# Altium PCB PCB2.PcbDoc (part 3 of 3)
Units mm, origin at the board's own origin, x right, y up, seen from the top; angles counter-clockwise.
Board outline 89.15 x 51.05 mm, 2 copper layers (Top Layer, Bottom Layer); 28 components, 20 nets, 117 pads, 27 vias.
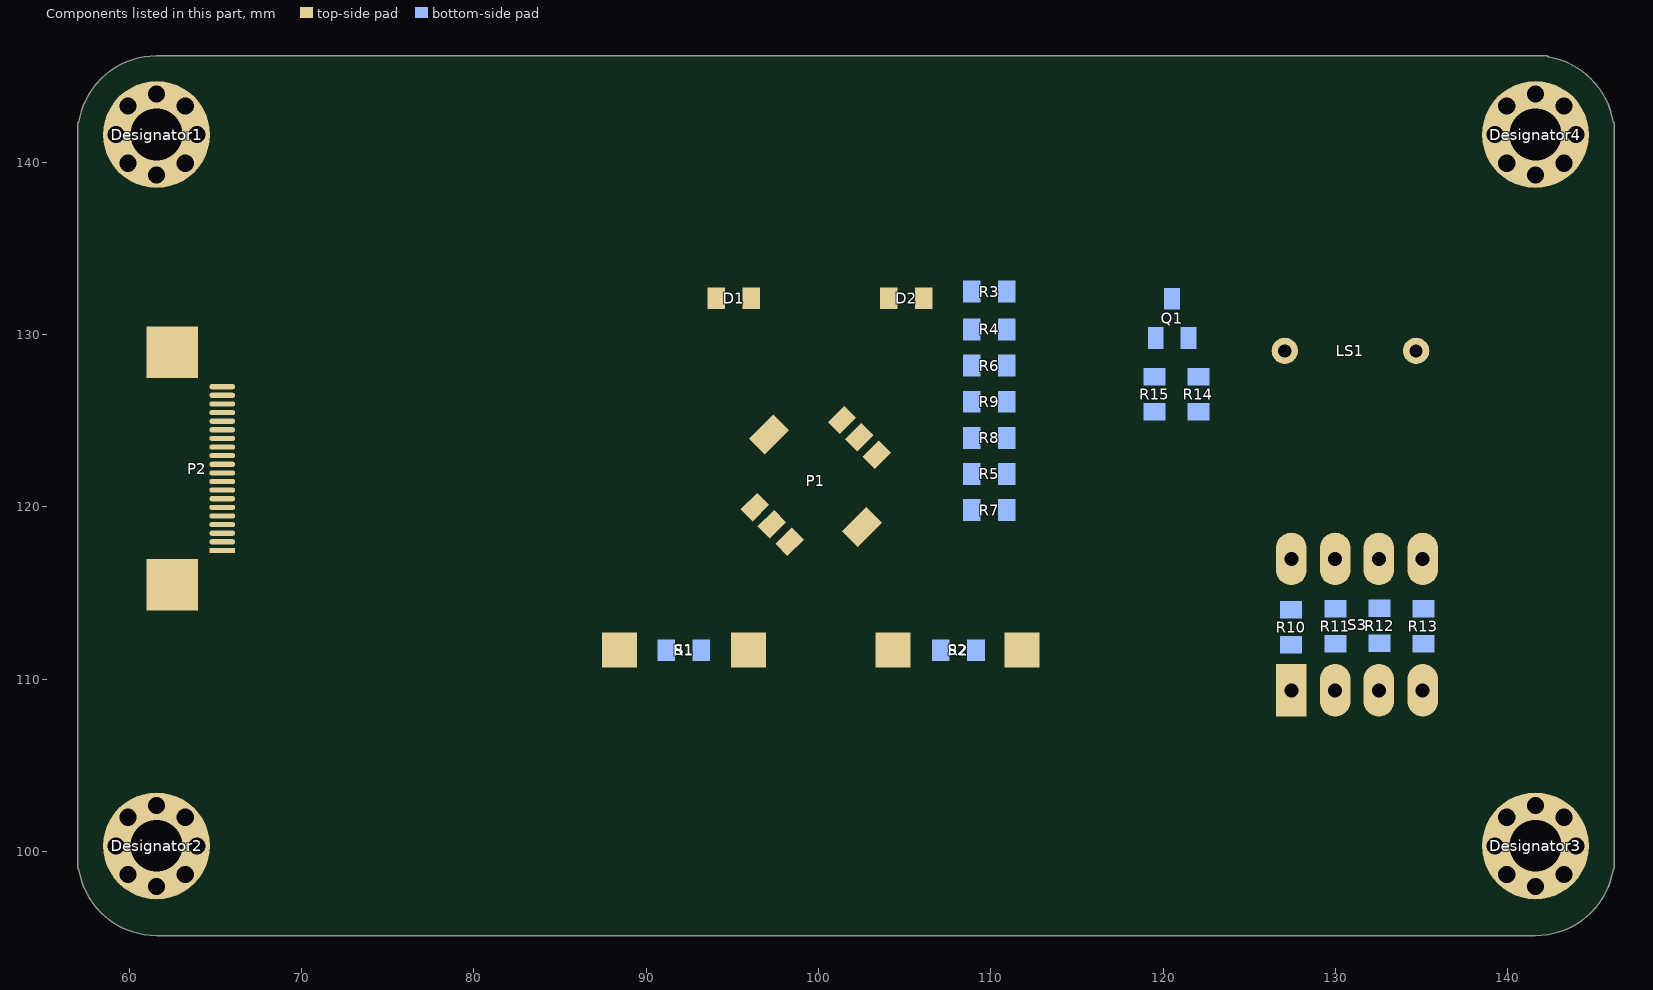
[diagram p3: the components of this part, seen from the top]

## Via types
v1: diameter 0.6, hole 0.3, Top Layer to Bottom Layer, 21 vias
v2: diameter 0.8, hole 0.4, Top Layer to Bottom Layer, 4 vias
v3: diameter 0.7, hole 0.7, Top Layer to Bottom Layer, 1 vias
v4: diameter 1, hole 1, Top Layer to Bottom Layer, 1 vias

## Nets (pads, with @x,y where several pads share a name; then routed paths per layer and width w, separated by ;. In a path a pad name is that pad's centre, name@x,y a point inside that pad or via, vN(x,y) a via of type N, cw(c..) or ccw(c..) an arc to the next point about the centre after c; other vN are vias at no path point) (continued)
copper on no net: (continued)
  Top Layer w0.009: 106.861,98.687 106.864,98.687 ; 106.861,98.704 106.864,98.704 ; 106.861,98.713 106.864,98.713 ; 106.861,98.74 106.864,98.74 ; 106.861,98.758 106.864,98.758 ; 106.861,98.767 106.864,98.767 ; 106.861,98.776 106.864,98.776 ; 106.861,98.811 106.864,98.811 ; 106.861,98.82 106.864,98.82 ; 106.861,98.829 106.864,98.829 ; 106.861,98.838 106.864,98.838 ; 106.861,98.9 106.864,98.9 ; 106.861,98.953 106.864,98.953 ; 106.861,99.033 106.864,99.033 ; 106.861,99.051 106.864,99.051 ; 106.861,99.06 106.864,99.06 ; 106.861,99.078 106.864,99.078 ; 106.861,99.087 106.864,99.087 ; 106.861,99.416 106.864,99.416 ; 106.861,101.505 106.864,101.505 ; 106.87,102.589 108.562,102.589 ; 106.87,102.598 106.873,102.598 ; 106.879,98.26 106.899,98.26 ; 106.879,98.278 106.882,98.278 ; 106.879,99.416 106.899,99.416 ; 106.887,101.496 107.548,101.496 ; 106.887,101.505 107.53,101.505 ; 106.887,101.531 106.89,101.531 ; 106.887,102.598 108.562,102.598 ; 106.896,101.514 106.899,101.514 ; 106.905,101.531 107.548,101.531 ; 106.914,99.416 106.917,99.416 ; 106.914,99.424 106.917,99.424 ; 106.914,101.514 107.548,101.514 ; 106.914,101.523 107.548,101.523 ; 106.923,101.549 107.53,101.549 ; 106.923,102.58 106.926,102.58 ; 106.932,98.242 106.935,98.242 ; 106.932,101.54 106.935,101.54 ; 106.932,102.572 106.953,102.572 ; 106.941,98.224 106.944,98.224 ; 106.941,98.233 108.562,98.233 ; 106.95,101.54 107.539,101.54 ; 106.95,102.58 108.562,102.58 ; 106.959,98.224 108.562,98.224 ; 106.967,98.215 106.988,98.215 ; 106.967,98.251 106.97,98.251 ; 106.967,99.416 106.97,99.416 ; 106.967,99.442 106.979,99.442 ; 106.967,102.572 108.562,102.572 ; 106.976,101.567 107.53,101.567 ; 106.985,98.251 106.988,98.251 ; 106.985,101.558 107.53,101.558 ; 106.985,101.585 106.988,101.585 ; 106.985,102.554 106.988,102.554 ; 106.994,99.433 106.997,99.433 ; 106.994,99.451 107.006,99.451 ; 106.994,101.594 107.53,101.594 ; 106.994,102.545 106.997,102.545 ; 106.994,102.563 108.562,102.563 ; 107.012,98.215 108.562,98.215 ; 107.012,98.242 107.015,98.242 ; 107.012,98.251 107.059,98.251 ; 107.012,99.433 107.024,99.433 ; 107.012,101.576 107.53,101.576 ; 107.012,101.585 107.015,101.585 ; 107.012,102.545 108.562,102.545 ; 107.021,99.451 107.024,99.451 ; 107.03,101.585 107.53,101.585 ; 107.03,102.554 108.562,102.554 ; 107.039,98.242 107.042,98.242 ; 107.039,101.603 107.53,101.603 ; 107.039,101.611 107.53,101.611 ; 107.039,102.527 107.05,102.527 ; 107.047,101.629 107.05,101.629 ; 107.056,98.242 107.068,98.242 ; 107.056,99.46 107.059,99.46 ; 107.056,102.536 107.059,102.536 ; 107.074,98.251 108.562,98.251 ; 107.074,98.26 107.077,98.26 ; 107.074,99.46 107.077,99.46 ; 107.074,101.629 107.077,101.629 ; 107.074,102.527 108.562,102.527 ; 107.083,98.242 108.562,98.242 ; 107.092,101.629 107.513,101.629 ; 107.092,102.509 107.095,102.509 ; 107.092,102.536 108.562,102.536 ; 107.101,98.269 108.562,98.269 ; 107.101,101.62 107.522,101.62 ; 107.101,102.518 107.113,102.518 ; 107.11,98.26 108.562,98.26 ; 107.11,98.295 107.113,98.295 ; 107.119,98.287 107.13,98.287 ; 107.119,99.469 107.122,99.469 ; 107.119,101.638 107.513,101.638 ; 107.119,101.647 107.513,101.647 ; 107.119,102.509 108.562,102.509 ; 107.127,98.295 107.139,98.295 ; 107.127,102.492 107.13,102.492 ; 107.127,102.518 107.139,102.518 ; 107.154,98.287 108.562,98.287 ; 107.154,98.295 108.562,98.295 ; 107.154,98.304 107.157,98.304 ; 107.154,101.656 107.157,101.656 ; 107.154,101.665 107.157,101.665 ; 107.154,102.518 108.562,102.518 ; 107.163,98.278 108.562,98.278 ; 107.163,101.674 107.486,101.674 ; 107.172,98.313 108.562,98.313 ; 107.172,99.496 107.175,99.496 ; 107.172,101.656 107.495,101.656 ; 107.172,101.665 107.175,101.665 ; 107.172,102.5 107.175,102.5 ; 107.19,101.665 107.495,101.665 ; 107.19,102.492 108.562,102.492 ; 107.19,102.5 108.562,102.5 ; 107.199,101.691 107.202,101.691 ; 107.199,102.465 107.202,102.465 ; 107.207,98.304 108.562,98.304 ; 107.216,101.691 107.486,101.691 ; 107.216,102.465 108.562,102.465 ; 107.216,102.474 107.219,102.474 ; 107.216,102.483 108.562,102.483 ; 107.225,99.513 107.228,99.513 ; 107.225,99.522 107.228,99.522 ; 107.225,101.683 107.486,101.683 ; 107.234,98.322 108.562,98.322 ; 107.234,102.447 107.237,102.447 ; 107.234,102.474 108.562,102.474 ; 107.243,102.456 107.246,102.456 ; 107.252,98.331 108.562,98.331 ; 107.252,101.7 107.264,101.7 ; 107.252,101.709 107.264,101.709 ; 107.261,99.531 107.264,99.531 ; 107.27,99.54 107.273,99.54 ; 107.27,102.447 108.562,102.447 ; 107.27,102.456 108.562,102.456 ; 107.279,98.34 108.562,98.34 ; 107.279,98.349 108.562,98.349 ; 107.279,99.531 107.282,99.531 ; 107.279,101.709 107.486,101.709 ; 107.287,98.358 108.562,98.358 ; 107.287,98.375 107.29,98.375 ; 107.287,101.7 107.486,101.7 ; 107.287,102.429 107.299,102.429 ; 107.287,102.438 108.562,102.438 ; 107.314,98.367 107.317,98.367 ; 107.314,98.375 108.562,98.375 ; 107.314,102.429 108.562,102.429 ; 107.332,98.367 108.562,98.367 ; 107.332,101.718 107.335,101.718 ; 107.332,101.736 107.486,101.736 ; 107.332,102.403 107.335,102.403 ; 107.332,102.42 107.335,102.42 ; 107.341,99.576 107.344,99.576 ; 107.341,102.412 108.562,102.412 ; 107.35,98.384 107.353,98.384 ; 107.35,99.602 107.353,99.602 ; 107.35,101.718 107.353,101.718 ; 107.35,102.403 108.562,102.403 ; 107.35,102.42 108.562,102.42 ; 107.367,101.727 107.379,101.727 ; 107.376,98.384 108.562,98.384 ; 107.376,98.393 107.379,98.393 ; 107.376,98.411 107.379,98.411 ; 107.376,102.394 107.379,102.394 ; 107.394,98.393 108.562,98.393 ; 107.394,98.411 107.397,98.411 ; 107.394,101.718 107.397,101.718 ; 107.394,101.727 107.468,101.727 ; 107.394,102.376 107.397,102.376 ; 107.394,102.394 108.562,102.394 ; 107.403,98.402 108.562,98.402 ; 107.412,98.411 108.562,98.411 ; 107.412,98.42 107.415,98.42 ; 107.412,101.718 107.459,101.718 ; 107.412,102.367 107.415,102.367 ; 107.412,102.385 107.424,102.385 ; 107.421,98.438 108.562,98.438 ; 107.421,99.665 107.433,99.665 ; 107.421,102.376 108.562,102.376 ; 107.439,98.429 108.562,98.429 ; 107.439,102.349 107.442,102.349 ; 107.439,102.367 108.562,102.367 ; 107.439,102.385 108.562,102.385 ; 107.448,98.42 108.562,98.42 ; 107.456,98.447 107.459,98.447 ; 107.456,98.455 107.459,98.455 ; 107.456,102.349 107.459,102.349 ; 107.456,102.358 108.562,102.358 ; 107.465,99.709 107.468,99.709 ; 107.474,98.447 108.562,98.447 ; 107.474,98.455 108.562,98.455 ; 107.474,101.718 107.477,101.718 ; 107.474,102.34 107.477,102.34 ; 107.474,102.349 108.562,102.349 ; 107.483,101.727 107.486,101.727 ; 107.483,102.332 108.562,102.332 ; 107.492,98.464 108.562,98.464 ; 107.492,98.473 108.562,98.473 ; 107.492,102.34 108.562,102.34 ; 107.501,99.736 107.513,99.736 ; 107.501,101.674 107.513,101.674 ; 107.501,101.683 107.504,101.683 ; 107.501,101.691 107.513,101.691 ; 107.501,102.314 107.504,102.314 ; 107.51,99.718 107.513,99.718 ; 107.51,99.727 107.513,99.727 ; 107.51,101.656 107.522,101.656 ; 107.51,101.665 107.513,101.665 ; 107.51,101.709 107.513,101.709 ; 107.519,102.305 108.562,102.305 ; 107.519,102.314 108.562,102.314 ; 107.519,102.323 108.562,102.323 ; 107.528,101.158 107.53,101.158 ; 107.528,101.176 107.53,101.176 ; 107.528,101.629 107.53,101.629 ; 107.536,98.482 108.562,98.482 ; 107.536,98.491 108.562,98.491 ; 107.536,98.5 108.562,98.5 ; 107.536,102.287 107.539,102.287 ; 107.545,101.46 107.548,101.46 ; 107.545,101.549 107.548,101.549 ; 107.545,102.296 108.562,102.296 ; 107.554,98.509 107.557,98.509 ; 107.554,102.287 108.562,102.287 ; 107.572,99.798 107.575,99.798 ; 107.572,99.816 107.575,99.816 ; 107.572,101.051 107.575,101.051 ; 107.581,98.509 108.562,98.509 ; 107.581,102.269 108.562,102.269 ; 107.581,102.278 108.562,102.278 ; 107.59,99.833 107.593,99.833 ; 107.59,101.016 107.593,101.016 ; 107.599,98.518 108.562,98.518 ; 107.599,98.527 108.562,98.527 ; 107.599,98.535 107.602,98.535 ; 107.599,99.869 107.602,99.869 ; 107.608,98.544 107.61,98.544 ; 107.608,99.86 107.61,99.86 ; 107.608,100.998 107.61,100.998 ; 107.608,101.025 107.61,101.025 ; 107.608,102.243 108.562,102.243 ; 107.616,98.535 108.562,98.535 ; 107.616,102.225 107.619,102.225 ; 107.616,102.252 108.562,102.252 ; 107.616,102.26 108.562,102.26 ; 107.625,98.553 108.562,98.553 ; 107.625,99.896 107.628,99.896 ; 107.625,99.922 107.628,99.922 ; 107.634,98.544 108.562,98.544 ; 107.634,100.962 107.637,100.962 ; 107.634,102.225 108.562,102.225 ; 107.634,102.234 107.637,102.234 ; 107.643,98.562 108.562,98.562 ; 107.643,98.571 108.562,98.571 ; 107.643,99.967 107.646,99.967 ; 107.643,99.976 107.646,99.976 ; 107.652,102.207 107.655,102.207 ; 107.652,102.216 107.655,102.216 ; 107.652,102.234 108.562,102.234 ; 107.661,98.589 107.664,98.589 ; 107.661,98.598 107.664,98.598 ; 107.661,100.011 107.664,100.011 ; 107.661,100.874 107.673,100.874 ; 107.661,100.909 107.664,100.909 ; 107.67,100.002 107.673,100.002 ; 107.67,100.882 107.673,100.882 ; 107.67,100.891 107.673,100.891 ; 107.67,100.9 107.673,100.9 ; 107.67,102.207 108.562,102.207 ; 107.679,98.589 108.562,98.589 ; 107.679,98.598 108.562,98.598 ; 107.679,102.189 107.682,102.189 ; 107.679,102.198 107.682,102.198 ; 107.679,102.216 108.562,102.216 ; 107.688,98.58 108.562,98.58 ; 107.688,102.18 108.562,102.18 ; 107.696,98.615 108.562,98.615 ; 107.696,102.163 107.699,102.163 ; 107.696,102.189 108.562,102.189 ; 107.696,102.198 108.562,102.198 ; 107.705,100.136 107.708,100.136 ; 107.705,100.145 107.708,100.145 ; 107.705,100.189 107.708,100.189 ; 107.705,100.722 107.708,100.722 ; 107.714,98.607 108.562,98.607 ; 107.714,102.163 108.562,102.163 ; 107.714,102.171 108.562,102.171 ; 107.723,98.624 108.562,98.624 ; 107.723,98.633 107.726,98.633 ; 107.723,100.207 107.726,100.207 ; 107.723,100.242 107.735,100.242 ; 107.723,100.313 107.735,100.313 ; 107.723,100.367 107.735,100.367 ; 107.723,100.554 107.753,100.554 ; 107.723,100.651 107.735,100.651 ; 107.723,100.678 107.735,100.678 ; 107.723,100.687 107.726,100.687 ; 107.723,100.696 107.735,100.696 ; 107.723,100.714 107.735,100.714 ; 107.723,100.722 107.735,100.722 ; 107.732,100.233 107.735,100.233 ; 107.732,100.251 107.735,100.251 ; 107.732,100.26 107.735,100.26 ; 107.732,100.296 107.735,100.296 ; 107.732,100.305 107.735,100.305 ; 107.732,100.34 107.735,100.34 ; 107.732,100.358 107.744,100.358 ; 107.732,100.402 107.735,100.402 ; 107.732,100.429 107.753,100.429 ; 107.732,100.474 107.735,100.474 ; 107.732,100.625 107.735,100.625 ; 107.732,100.642 107.744,100.642 ; 107.732,100.669 107.735,100.669 ; 107.732,100.705 107.735,100.705 ; 107.732,100.74 107.735,100.74 ; 107.741,98.633 108.562,98.633 ; 107.741,98.642 107.744,98.642 ; 107.741,98.66 107.744,98.66 ; 107.741,102.145 108.562,102.145 ; 107.75,100.367 107.753,100.367 ; 107.75,100.385 107.753,100.385 ; 107.75,100.393 107.753,100.393 ; 107.75,100.402 107.753,100.402 ; 107.75,100.411 107.753,100.411 ; 107.75,100.438 107.753,100.438 ; 107.75,100.491 107.753,100.491 ; 107.75,100.5 107.753,100.5 ; 107.75,100.536 107.753,100.536 ; 107.75,100.545 107.753,100.545 ; 107.75,100.58 107.753,100.58 ; 107.75,102.154 108.562,102.154 ; 107.759,98.642 107.762,98.642 ; 107.759,98.651 108.562,98.651 ; 107.759,98.66 108.562,98.66 ; 107.768,98.678 108.562,98.678 ; 107.768,102.127 108.562,102.127 ; 107.768,102.136 108.562,102.136 ; 107.776,98.642 108.562,98.642 ; 107.776,98.669 108.562,98.669 ; 107.776,102.1 108.562,102.1 ; 107.776,102.118 107.788,102.118 ; 107.785,102.109 107.788,102.109 ; 107.803,98.696 108.562,98.696 ; 107.803,102.083 107.806,102.083 ; 107.803,102.109 108.562,102.109 ; 107.803,102.118 108.562,102.118 ; 107.812,98.687 108.562,98.687 ; 107.812,102.091 108.562,102.091 ; 107.821,98.704 107.824,98.704 ; 107.821,98.722 108.562,98.722 ; 107.821,102.074 107.824,102.074 ; 107.821,102.083 108.562,102.083 ; 107.83,98.713 108.562,98.713 ; 107.83,102.065 108.562,102.065 ; 107.839,98.704 108.562,98.704 ; 107.839,98.731 107.851,98.731 ; 107.839,98.74 108.562,98.74 ; 107.839,102.074 108.562,102.074 ; 107.848,102.056 107.851,102.056 ; 107.856,102.047 108.562,102.047 ; 107.865,98.731 108.562,98.731 ; 107.865,98.758 108.562,98.758 ; 107.865,102.056 108.562,102.056 ; 107.874,98.749 108.562,98.749 ; 107.874,102.029 108.562,102.029 ; 107.883,98.767 107.886,98.767 ; 107.883,98.776 107.886,98.776 ; 107.883,102.011 107.886,102.011 ; 107.883,102.038 108.562,102.038 ; 107.901,98.767 108.562,98.767 ; 107.901,98.776 108.562,98.776 ; 107.901,98.802 108.562,98.802 ; 107.901,101.994 107.904,101.994 ; 107.901,102.003 108.562,102.003 ; 107.901,102.011 108.562,102.011 ; 107.901,102.02 108.562,102.02 ; 107.919,98.784 108.562,98.784 ; 107.919,98.793 108.562,98.793 ; 107.919,98.811 107.922,98.811 ; 107.919,98.82 107.922,98.82 ; 107.919,101.985 108.562,101.985 ; 107.919,101.994 108.562,101.994 ; 107.928,101.967 108.562,101.967 ; 107.936,98.811 108.562,98.811 ; 107.936,98.82 108.562,98.82 ; 107.936,98.829 107.939,98.829 ; 107.936,98.838 107.939,98.838 ; 107.936,101.94 107.939,101.94 ; 107.936,101.949 107.939,101.949 ; 107.936,101.976 108.562,101.976 ; 107.954,98.829 108.562,98.829 ; 107.954,98.838 108.562,98.838 ; 107.954,101.949 108.562,101.949 ; 107.963,101.931 107.966,101.931 ; 107.963,101.94 108.562,101.94 ; 107.963,101.958 108.562,101.958 ; 107.972,98.847 108.562,98.847 ; 107.981,98.856 108.562,98.856 ; 107.981,98.864 108.562,98.864 ; 107.981,98.873 108.562,98.873 ; 107.981,98.9 107.984,98.9 ; 107.981,101.905 108.562,101.905 ; 107.981,101.923 108.562,101.923 ; 107.981,101.931 108.562,101.931 ; 107.99,98.891 108.562,98.891 ; 107.999,98.882 108.562,98.882 ; 107.999,98.9 108.562,98.9 ; 107.999,98.909 108.002,98.909 ; 107.999,101.878 108.562,101.878 ; 107.999,101.887 108.002,101.887 ; 107.999,101.896 108.002,101.896 ; 107.999,101.914 108.562,101.914 ; 108.016,98.909 108.028,98.909 ; 108.016,98.918 108.562,98.918 ; 108.016,98.936 108.019,98.936 ; 108.016,101.86 108.019,101.86 ; 108.016,101.887 108.562,101.887 ; 108.016,101.896 108.562,101.896 ; 108.025,98.927 108.028,98.927 ; 108.025,101.843 108.028,101.843 ; 108.025,101.869 108.562,101.869 ; 108.043,98.909 108.562,98.909 ; 108.043,98.927 108.562,98.927 ; 108.043,98.936 108.562,98.936 ; 108.043,98.98 108.046,98.98 ; 108.043,101.843 108.046,101.843 ; 108.043,101.86 108.562,101.86 ; 108.052,98.944 108.562,98.944 ; 108.052,98.953 108.562,98.953 ; 108.052,98.962 108.562,98.962 ; 108.052,101.825 108.064,101.825 ; 108.052,101.834 108.562,101.834 ; 108.052,101.851 108.562,101.851 ; 108.061,98.971 108.064,98.971 ; 108.061,101.798 108.064,101.798 ; 108.061,101.807 108.064,101.807 ; 108.061,101.816 108.562,101.816 ; 108.061,101.843 108.562,101.843 ; 108.07,98.98 108.562,98.98 ; 108.079,98.971 108.562,98.971 ; 108.079,98.989 108.082,98.989 ; 108.079,98.998 108.082,98.998 ; 108.079,101.789 108.091,101.789 ; 108.079,101.798 108.562,101.798 ; 108.079,101.807 108.562,101.807 ; 108.079,101.825 108.562,101.825 ; 108.096,98.989 108.562,98.989 ; 108.096,98.998 108.562,98.998 ; 108.105,99.016 108.562,99.016 ; 108.105,99.024 108.562,99.024 ; 108.105,99.033 108.108,99.033 ; 108.105,101.763 108.562,101.763 ; 108.105,101.771 108.108,101.771 ; 108.105,101.78 108.562,101.78 ; 108.105,101.789 108.562,101.789 ; 108.114,99.007 108.562,99.007 ; 108.123,99.033 108.562,99.033 ; 108.123,99.042 108.562,99.042 ; 108.123,99.051 108.126,99.051 ; 108.123,99.06 108.126,99.06 ; 108.123,101.745 108.562,101.745 ; 108.123,101.754 108.562,101.754 ; 108.123,101.771 108.562,101.771 ; 108.132,101.727 108.562,101.727 ; 108.141,99.051 108.562,99.051 ; 108.141,99.06 108.562,99.06 ; 108.141,99.069 108.562,99.069 ; 108.141,99.087 108.562,99.087 ; 108.141,99.096 108.144,99.096 ; 108.141,101.718 108.562,101.718 ; 108.141,101.736 108.562,101.736 ; 108.15,99.078 108.562,99.078 ; 108.159,99.096 108.562,99.096 ; 108.159,101.7 108.562,101.7 ; 108.159,101.709 108.562,101.709 ; 108.168,99.104 108.562,99.104 ; 108.168,101.683 108.562,101.683 ; 108.168,101.691 108.562,101.691 ; 108.176,99.122 108.562,99.122 ; 108.185,99.113 108.562,99.113 ; 108.185,99.131 108.188,99.131 ; 108.185,99.14 108.562,99.14 ; 108.185,101.638 108.188,101.638 ; 108.185,101.656 108.562,101.656 ; 108.185,101.665 108.562,101.665 ; 108.185,101.674 108.562,101.674 ; 108.194,101.629 108.197,101.629 ; 108.203,99.131 108.562,99.131 ; 108.203,99.149 108.562,99.149 ; 108.203,99.158 108.562,99.158 ; 108.203,99.167 108.206,99.167 ; 108.203,99.176 108.215,99.176 ; 108.203,99.184 108.206,99.184 ; 108.203,101.611 108.206,101.611 ; 108.203,101.62 108.562,101.62 ; 108.203,101.638 108.562,101.638 ; 108.203,101.647 108.562,101.647 ; 108.221,99.167 108.562,99.167 ; 108.221,99.184 108.562,99.184 ; 108.221,101.603 108.562,101.603 ; 108.221,101.629 108.562,101.629 ; 108.23,99.193 108.562,99.193 ; 108.23,99.202 108.562,99.202 ; 108.23,99.22 108.562,99.22 ; 108.23,101.611 108.562,101.611 ; 108.239,99.176 108.562,99.176 ; 108.239,99.211 108.562,99.211 ; 108.239,99.229 108.242,99.229 ; 108.239,99.238 108.242,99.238 ; 108.239,99.247 108.251,99.247 ; 108.239,101.558 108.562,101.558 ; 108.239,101.567 108.562,101.567 ; 108.239,101.576 108.562,101.576 ; 108.239,101.585 108.562,101.585 ; 108.239,101.594 108.562,101.594 ; 108.248,101.54 108.562,101.54 ; 108.248,101.549 108.251,101.549 ; 108.256,99.238 108.562,99.238 ; 108.256,99.256 108.562,99.256 ; 108.265,99.229 108.562,99.229 ; 108.265,99.247 108.562,99.247 ; 108.265,99.264 108.562,99.264 ; 108.265,99.273 108.268,99.273 ; 108.265,99.282 108.562,99.282 ; 108.265,101.496 108.268,101.496 ; 108.265,101.514 108.562,101.514 ; 108.265,101.531 108.562,101.531 ; 108.265,101.549 108.562,101.549 ; 108.274,101.523 108.562,101.523 ; 108.283,99.273 108.562,99.273 ; 108.283,99.291 108.562,99.291 ; 108.283,99.3 108.562,99.3 ; 108.283,101.478 108.562,101.478 ; 108.283,101.487 108.562,101.487 ; 108.283,101.496 108.562,101.496 ; 108.283,101.505 108.562,101.505 ; 108.292,99.318 108.562,99.318 ; 108.292,101.46 108.562,101.46 ; 108.301,99.309 108.562,99.309 ; 108.301,99.327 108.562,99.327 ; 108.301,99.336 108.304,99.336 ; 108.301,99.344 108.562,99.344 ; 108.301,101.416 108.304,101.416 ; 108.301,101.434 108.304,101.434 ; 108.301,101.443 108.562,101.443 ; 108.301,101.451 108.562,101.451 ; 108.301,101.469 108.562,101.469 ; 108.31,99.353 108.313,99.353 ; 108.319,99.336 108.562,99.336 ; 108.319,99.362 108.562,99.362 ; 108.319,101.425 108.562,101.425 ; 108.328,99.353 108.562,99.353 ; 108.328,99.371 108.562,99.371 ; 108.328,99.38 108.331,99.38 ; 108.328,99.389 108.562,99.389 ; 108.328,99.407 108.331,99.407 ; 108.328,101.38 108.331,101.38 ; 108.328,101.407 108.331,101.407 ; 108.328,101.434 108.562,101.434 ; 108.337,99.398 108.562,99.398 ; 108.337,101.416 108.562,101.416 ; 108.345,99.38 108.562,99.38 ; 108.345,99.407 108.562,99.407 ; 108.345,99.416 108.562,99.416 ; 108.345,99.424 108.562,99.424 ; 108.345,99.451 108.348,99.451 ; 108.345,101.345 108.348,101.345 ; 108.345,101.354 108.348,101.354 ; 108.345,101.371 108.348,101.371 ; 108.345,101.38 108.562,101.38 ; 108.345,101.389 108.562,101.389 ; 108.345,101.398 108.562,101.398 ; 108.345,101.407 108.562,101.407 ; 108.354,99.433 108.562,99.433 ; 108.354,99.442 108.562,99.442 ; 108.354,101.363 108.562,101.363 ; 108.363,99.451 108.562,99.451 ; 108.363,99.469 108.366,99.469 ; 108.363,99.478 108.366,99.478 ; 108.363,99.487 108.562,99.487 ; 108.363,101.309 108.366,101.309 ; 108.363,101.327 108.562,101.327 ; 108.363,101.336 108.562,101.336 ; 108.363,101.345 108.562,101.345 ; 108.363,101.354 108.562,101.354 ; 108.363,101.371 108.562,101.371 ; 108.372,99.46 108.562,99.46 ; 108.372,101.291 108.562,101.291 ; 108.372,101.3 108.562,101.3 ; 108.381,99.469 108.562,99.469 ; 108.381,99.478 108.562,99.478 ; 108.381,99.496 108.384,99.496 ; 108.381,99.504 108.562,99.504 ; 108.381,99.513 108.393,99.513 ; 108.381,99.522 108.384,99.522 ; 108.381,101.256 108.562,101.256 ; 108.381,101.274 108.562,101.274 ; 108.381,101.282 108.384,101.282 ; 108.381,101.309 108.562,101.309 ; 108.381,101.318 108.562,101.318 ; 108.39,99.54 108.393,99.54 ; 108.399,99.496 108.562,99.496 ; 108.399,99.522 108.562,99.522 ; 108.399,101.282 108.562,101.282 ; 108.408,99.513 108.562,99.513 ; 108.408,99.531 108.562,99.531 ; 108.408,99.54 108.562,99.54 ; 108.408,99.549 108.562,99.549 ; 108.408,99.558 108.411,99.558 ; 108.408,99.567 108.562,99.567 ; 108.408,99.585 108.411,99.585 ; 108.408,101.194 108.411,101.194 ; 108.408,101.211 108.562,101.211 ; 108.408,101.22 108.562,101.22 ; 108.408,101.229 108.411,101.229 ; 108.408,101.238 108.562,101.238 ; 108.408,101.247 108.562,101.247 ; 108.408,101.265 108.562,101.265 ; 108.417,99.576 108.562,99.576 ; 108.417,101.202 108.562,101.202 ; 108.425,99.558 108.562,99.558 ; 108.425,99.585 108.562,99.585 ; 108.425,99.593 108.562,99.593 ; 108.425,99.602 108.562,99.602 ; 108.425,99.611 108.562,99.611 ; 108.425,99.629 108.562,99.629 ; 108.425,101.14 108.428,101.14 ; 108.425,101.158 108.562,101.158 ; 108.425,101.176 108.562,101.176 ; 108.425,101.185 108.562,101.185 ; 108.425,101.194 108.562,101.194 ; 108.425,101.229 108.562,101.229 ; 108.434,99.62 108.562,99.62 ; 108.434,101.167 108.562,101.167 ; 108.443,99.638 108.562,99.638 ; 108.443,99.647 108.562,99.647 ; 108.443,99.656 108.562,99.656 ; 108.443,99.665 108.562,99.665 ; 108.443,101.078 108.446,101.078 ; 108.443,101.096 108.446,101.096 ; 108.443,101.114 108.446,101.114 ; 108.443,101.122 108.562,101.122 ; 108.443,101.131 108.562,101.131 ; 108.443,101.14 108.562,101.14 ; 108.443,101.149 108.562,101.149 ; 108.452,99.682 108.455,99.682 ; 108.452,99.7 108.455,99.7 ; 108.452,101.087 108.455,101.087 ; 108.461,99.673 108.562,99.673 ; 108.461,99.691 108.562,99.691 ; 108.461,101.078 108.562,101.078 ; 108.461,101.105 108.562,101.105 ; 108.461,101.114 108.562,101.114 ; 108.47,99.682 108.562,99.682 ; 108.47,99.7 108.562,99.7 ; 108.47,99.709 108.562,99.709 ; 108.47,99.718 108.562,99.718 ; 108.47,99.727 108.562,99.727 ; 108.47,99.789 108.473,99.789 ; 108.47,100.998 108.473,100.998 ; 108.47,101.069 108.562,101.069 ; 108.47,101.087 108.562,101.087 ; 108.47,101.096 108.562,101.096 ; 108.479,99.736 108.562,99.736 ; 108.479,99.745 108.562,99.745 ; 108.479,99.753 108.562,99.753 ; 108.479,99.78 108.562,99.78 ; 108.479,99.807 108.482,99.807 ; 108.479,101.016 108.562,101.016 ; 108.479,101.034 108.562,101.034 ; 108.479,101.051 108.562,101.051 ; 108.479,101.06 108.562,101.06 ; 108.488,99.762 108.562,99.762 ; 108.488,99.771 108.562,99.771 ; 108.488,99.789 108.562,99.789 ; 108.488,99.816 108.562,99.816 ; 108.488,99.842 108.491,99.842 ; 108.488,99.86 108.491,99.86 ; 108.488,100.971 108.491,100.971 ; 108.488,100.98 108.562,100.98 ; 108.488,100.989 108.562,100.989 ; 108.488,100.998 108.562,100.998 ; 108.488,101.007 108.562,101.007 ; 108.488,101.025 108.562,101.025 ; 108.488,101.042 108.562,101.042 ; 108.497,99.798 108.562,99.798 ; 108.497,99.807 108.562,99.807 ; 108.497,100.954 108.562,100.954 ; 108.505,99.825 108.562,99.825 ; 108.505,99.833 108.562,99.833 ; 108.505,99.842 108.562,99.842 ; 108.505,99.851 108.562,99.851 ; 108.505,99.86 108.562,99.86 ; 108.505,99.869 108.562,99.869 ; 108.505,99.878 108.517,99.878 ; 108.505,99.905 108.517,99.905 ; 108.505,99.913 108.517,99.913 ; 108.505,99.931 108.517,99.931 ; 108.505,99.958 108.508,99.958 ; 108.505,100.847 108.508,100.847 ; 108.505,100.865 108.508,100.865 ; 108.505,100.882 108.508,100.882 ; 108.505,100.9 108.508,100.9 ; 108.505,100.909 108.562,100.909 ; 108.505,100.918 108.508,100.918 ; 108.505,100.927 108.562,100.927 ; 108.505,100.936 108.562,100.936 ; 108.505,100.945 108.562,100.945 ; 108.505,100.962 108.562,100.962 ; 108.505,100.971 108.562,100.971 ; 108.514,100.891 108.562,100.891 ; 108.523,99.887 108.562,99.887 ; 108.523,99.896 108.562,99.896 ; 108.523,99.922 108.562,99.922 ; 108.523,99.94 108.562,99.94 ; 108.523,100.856 108.562,100.856 ; 108.523,100.874 108.562,100.874 ; 108.523,100.9 108.562,100.9 ; 108.523,100.918 108.562,100.918 ; 108.532,99.878 108.562,99.878 ; 108.532,99.905 108.562,99.905 ; 108.532,99.913 108.562,99.913 ; 108.532,99.931 108.562,99.931 ; 108.532,99.949 108.562,99.949 ; 108.532,99.958 108.562,99.958 ; 108.532,99.967 108.562,99.967 ; 108.532,99.976 108.562,99.976 ; 108.532,99.985 108.562,99.985 ; 108.532,99.993 108.562,99.993 ; 108.532,100.011 108.562,100.011 ; 108.532,100.038 108.562,100.038 ; 108.532,100.056 108.562,100.056 ; 108.532,100.749 108.562,100.749 ; 108.532,100.776 108.562,100.776 ; 108.532,100.785 108.562,100.785 ; 108.532,100.802 108.562,100.802 ; 108.532,100.811 108.562,100.811 ; 108.532,100.82 108.562,100.82 ; 108.532,100.838 108.562,100.838 ; 108.532,100.847 108.562,100.847 ; 108.532,100.865 108.562,100.865 ; 108.532,100.882 108.562,100.882 ; 108.541,100.002 108.562,100.002 ; 108.541,100.02 108.562,100.02 ; 108.541,100.029 108.562,100.029 ; 108.541,100.047 108.562,100.047 ; 108.541,100.065 108.562,100.065 ; 108.541,100.073 108.562,100.073 ; 108.541,100.082 108.562,100.082 ; 108.541,100.091 108.562,100.091 ; 108.541,100.1 108.562,100.1 ; 108.541,100.109 108.562,100.109 ; 108.541,100.118 108.562,100.118 ; 108.541,100.127 108.562,100.127 ; 108.541,100.136 108.562,100.136 ; 108.541,100.153 108.544,100.153 ; 108.541,100.162 108.544,100.162 ; 108.541,100.18 108.544,100.18 ; 108.541,100.216 108.544,100.216 ; 108.541,100.251 108.544,100.251 ; 108.541,100.269 108.544,100.269 ; 108.541,100.278 108.544,100.278 ; 108.541,100.509 108.544,100.509 ; 108.541,100.545 108.544,100.545 ; 108.541,100.562 108.544,100.562 ; 108.541,100.589 108.544,100.589 ; 108.541,100.607 108.562,100.607 ; 108.541,100.642 108.562,100.642 ; 108.541,100.651 108.562,100.651 ; 108.541,100.669 108.562,100.669 ; 108.541,100.678 108.562,100.678 ; 108.541,100.687 108.562,100.687 ; 108.541,100.696 108.562,100.696 ; 108.541,100.705 108.562,100.705 ; 108.541,100.714 108.562,100.714 ; 108.541,100.722 108.562,100.722 ; 108.541,100.731 108.562,100.731 ; 108.541,100.74 108.562,100.74 ; 108.541,100.758 108.562,100.758 ; 108.541,100.767 108.562,100.767 ; 108.541,100.794 108.562,100.794 ; 108.541,100.829 108.562,100.829 ; 108.55,100.145 108.553,100.145 ; 108.55,100.189 108.562,100.189 ; 108.55,100.207 108.553,100.207 ; 108.55,100.233 108.553,100.233 ; 108.55,100.571 108.553,100.571 ; 108.55,100.598 108.562,100.598 ; 108.55,100.616 108.562,100.616 ; 108.55,100.625 108.562,100.625 ; 108.55,100.634 108.562,100.634 ; 108.55,100.66 108.562,100.66 ; 108.559,100.153 108.562,100.153 ; 108.559,100.162 108.562,100.162 ; 108.559,100.171 108.562,100.171 ; 108.559,100.545 108.562,100.545 ; 108.559,100.562 108.562,100.562
  other v3: 98.485,122.844
  other v4: 101.179,120.149

## Polygon pours and split planes (outlines as drawn)
DGND on Top Layer "Bottom Layer-No Net" (solid, remove dead copper, pour order 4): 51.435,149.454 53.873,147.015 53.873,88.951 162.992,88.951 171.475,97.434 147.168,121.742 147.168,149.047
DGND on Bottom Layer "Bottom Layer-No Net" (solid, remove dead copper, pour order 6): 51.968,150.063 151.587,150.063 151.79,149.86 148.463,146.533 148.463,92.278 55.093,92.278 54.229,93.142

## Keep-outs
Keep-Out Layer:
  lines w0.254: 57.15,99.06 57.15,142.24 ; 57.15,99.695 ccw(c61.912,100.013) 62.23,95.25 ; 57.15,141.605 cw(c61.595,141.605) 61.595,146.05 142.24,146.05 ; 60.96,95.25 142.875,95.25 ; 141.605,146.05 cw(c141.605,141.605) 146.05,141.605 ; 142.24,95.25 ccw(c141.605,99.695) 146.05,100.33 ; 146.05,99.695 146.05,142.24

## Other copper
Top Layer:
  rectangle net VCC_3V3: 64.77,117.373 66.091,118.085
  text "Designed by LiuYang" at 109.827,101.584 h1.02
  text "github.com/liuyang9609" at 109.827,98.584 h1.02
Bottom Layer:
  text "Stereo Project Control Board" at 95.885,98.298 h1.02

## Silkscreen, mask and mechanical layers (free items; w line width, h text height)
Top Overlay:
  text "JLCJLCJLCJLC" at 61.671,126.975 h0.8 r90
  text "1" at 67.92,117.551 h1.02 r90
Mechanical 1:
  lines w0.254: 57.15,99.06 57.15,142.24 ; 57.15,99.695 ccw(c61.595,99.695) 61.595,95.25 141.605,95.25 ccw(c141.605,99.695) 146.05,99.695 ; 57.15,141.605 cw(c61.595,141.605) 61.595,146.05 142.24,146.05 ; 141.605,146.05 cw(c141.605,141.605) 146.05,141.605 ; 146.05,99.06 146.05,142.24